# Altium PCB EE209_PCB.PcbDoc
Units mm, origin at the board's own origin, x right, y up, seen from the top; angles counter-clockwise.
Board outline 152.4 x 101.6 mm, 2 copper layers (Top Layer, Bottom Layer); 47 components, 37 nets, 176 pads, 0 vias.
Unrouted connection lines stored in the file: 116.
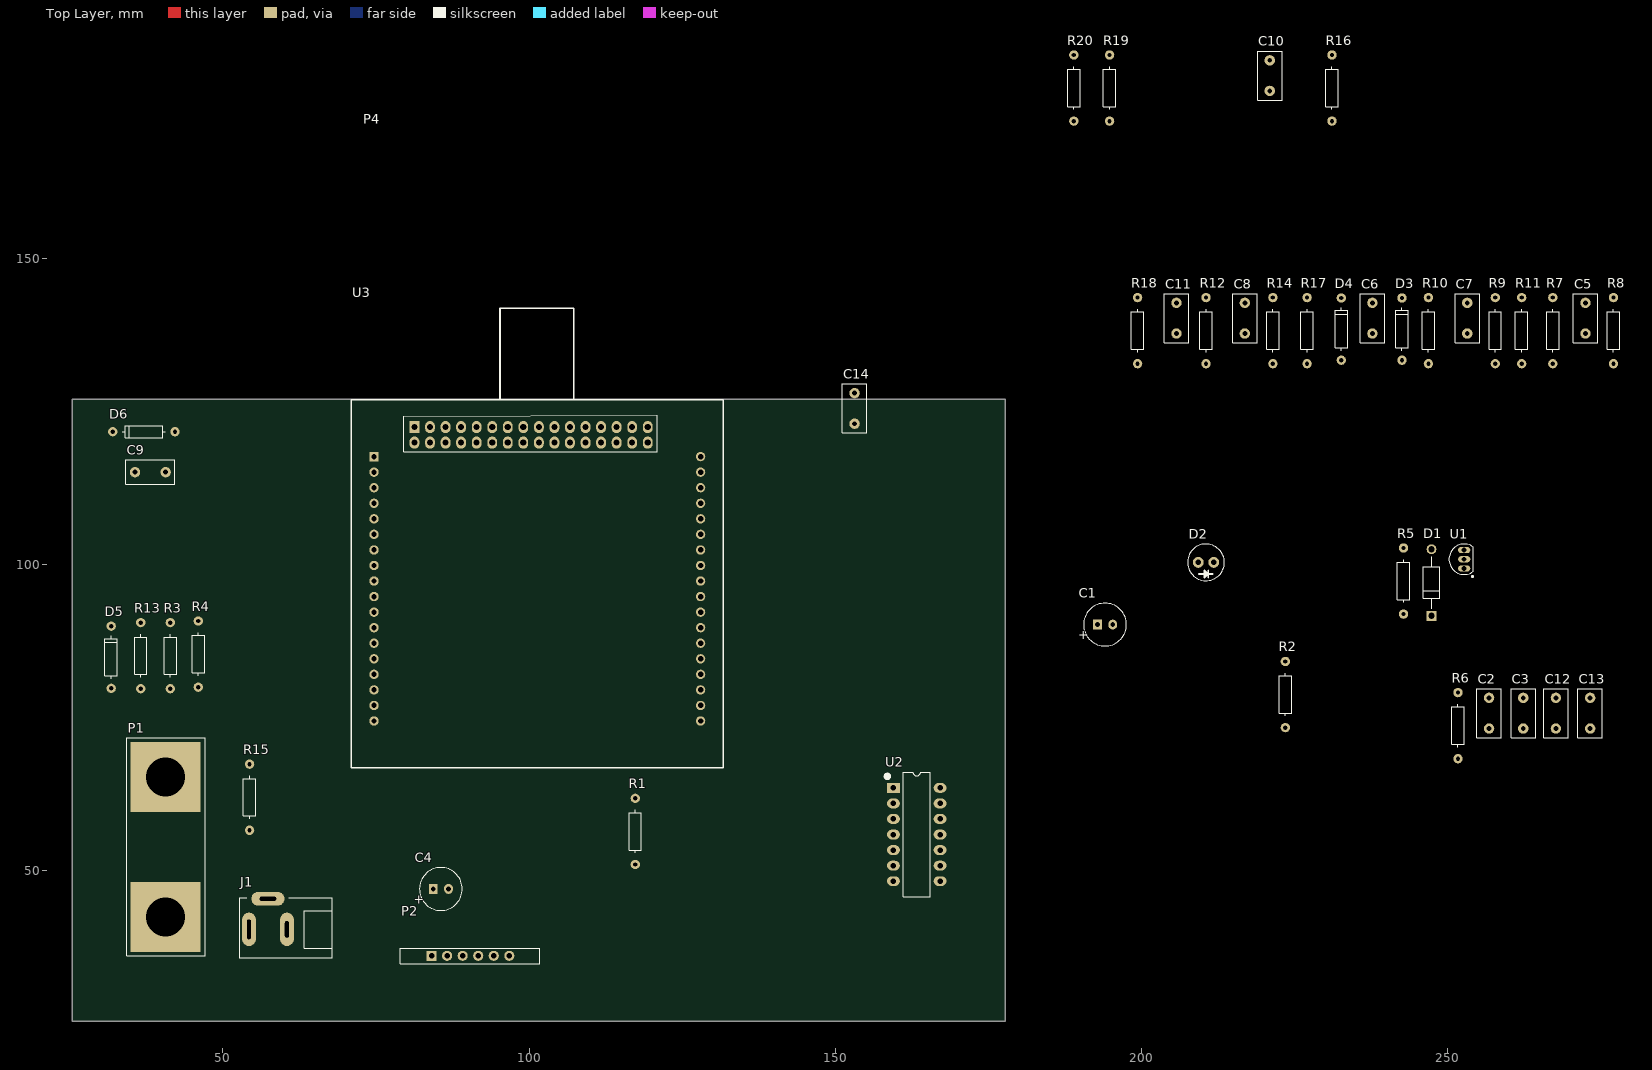
[diagram p0: Top Layer view]
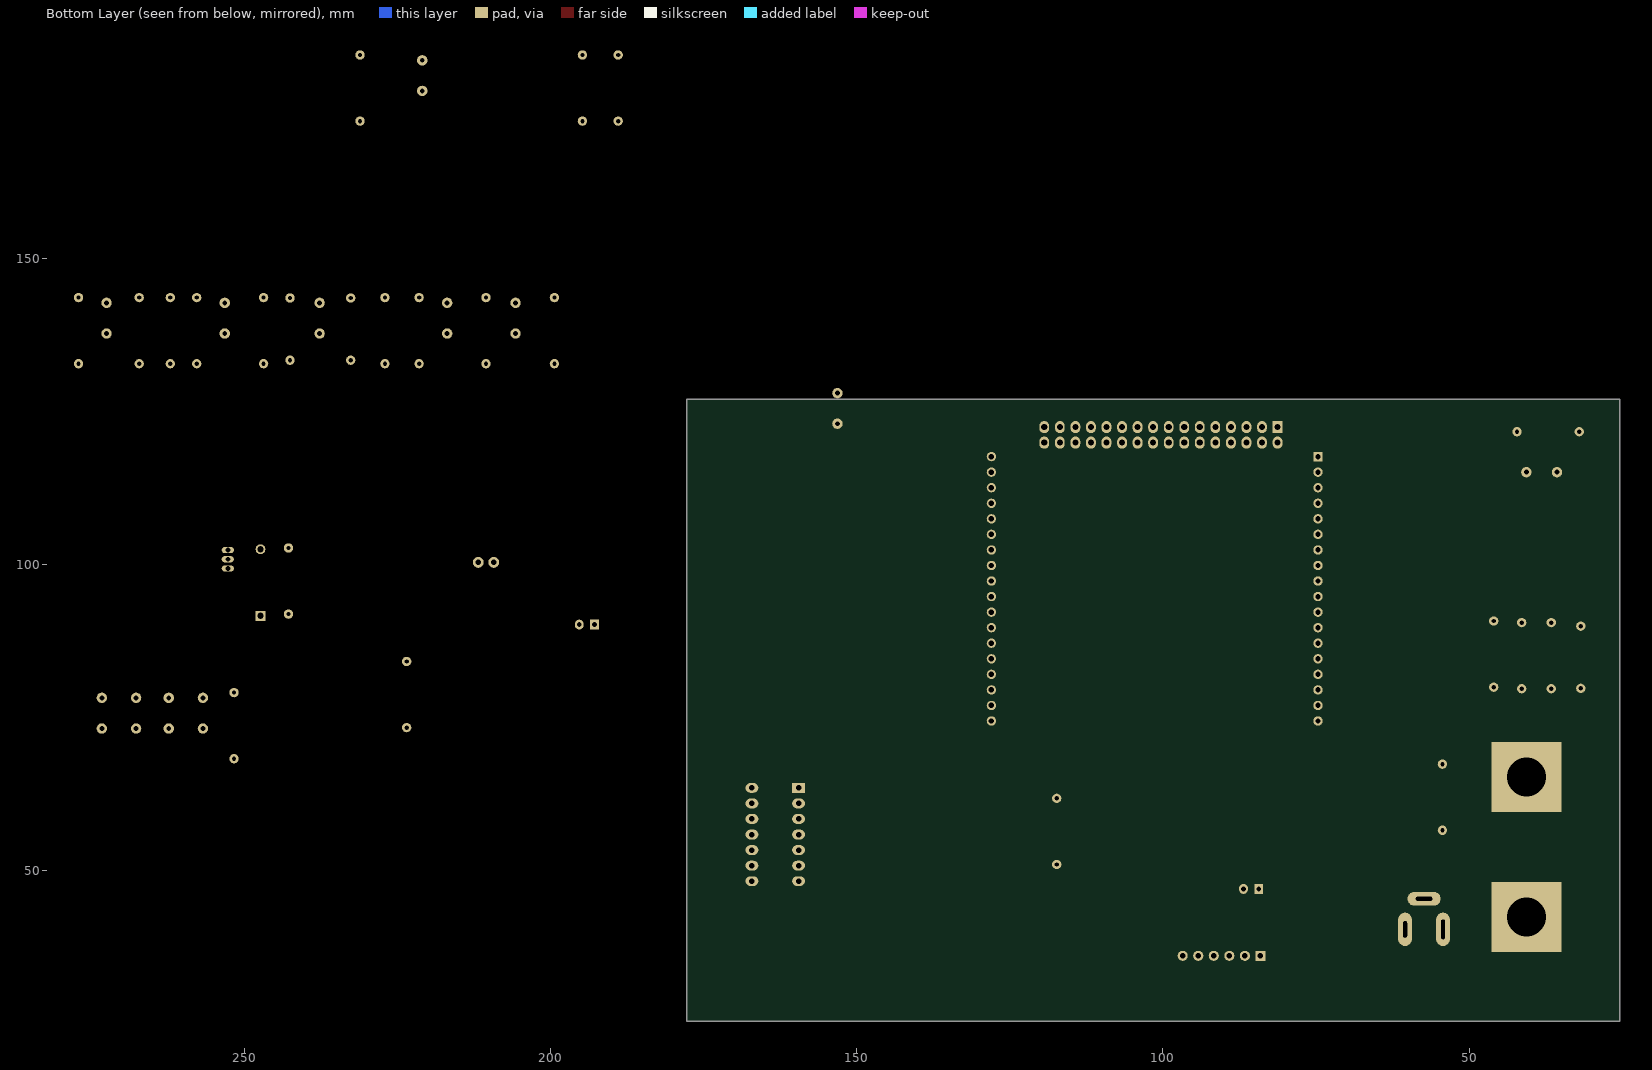
[diagram p1: Bottom Layer view, seen from below]

## Layer stack, top to bottom
Top Solder: solder mask 0.0102, Solder Resist, Dk 3.5
Top Layer: signal copper 0.0356
Dielectric 1: dielectric 0.32, FR-4, Dk 4.8
Bottom Layer: signal copper 0.0356
Bottom Solder: solder mask 0.0102, Solder Resist, Dk 3.5

## Board outline
25.4,25.4 177.8,25.4 177.8,127 25.4,127

## Design rules (kind name [scope] priority, off if disabled: settings)
BoardOutlineClearance [All] p1: gap=0.5 ignorepadtopadclearanceinfootprint=FALSE
Clearance [All] p1: gap=0.4 ignorepadtopadclearanceinfootprint=FALSE
Height [All] p1: minheight=0 maxheight=50 prefheight=12.7
HoleSize [All] p1: absolutevalues=TRUE maxlimit=6 minlimit=0.5 maxpercent=80.000 minpercent=20.000
MinimumAnnularRing [All] p1: minimumring=0.076
MinimumSolderMaskSliver [All] p1: minsoldermaskwidth=0.1
PlaneConnect [All] p1: planeconnectstyle=Relief reliefexpansion=0.6 reliefentries=4 reliefconductorwidth=0.6 reliefairgap=0.4
PolygonConnect PolygonConnect_1 [All] p1: connectstyle=Relief reliefconductorwidth=0.6 reliefentries=4 polygonreliefangle="90 Angle" airgapwidth=0.4
RoomDefinition EE209_Schematic [InComponentClass('EE209_Schematic')] p1: confinementstyle=ConfineIn formatcopy=TRUE lockcomponents=FALSE outline 178.816,67.564 485.14,67.564 485.14,186.944 178.816,186.944
RoutingCorners [All] p1: cornerstyle=Round minsetback=2.54 maxsetback=2.54
RoutingVias [All] p1: holewidth=0.6 width=1 viastyle="Through Hole" minholewidth=0.5 minwidth=0.8 maxholewidth=1 maxwidth=2
SilkToSilkClearance [All] p1: silktosilkclearance=0.1
SilkToSolderMaskClearance [IsPad] p1: minsilkscreentomaskgap=0.1 clearancetoexposedcopper=TRUE
SolderMaskExpansion [All] p1: expansion=0.102 istentingtop=FALSE
Width [All] p1: maxlimit=10 minlimit=0.4 preferedwidth=0.6
23 further rules are at their usual default settings.

## Components (designator, comment, footprint, x,y, rotation, side; value= is the part's Value field where it differs from the comment)
C1 "*" "CAP-RAD-2.5mm Pitch" 194.076,90.17 r0 top
C2 "*" CCAP-5P0 256.794,75.692 r90 top
C3 "*" CCAP-5P0 262.382,75.692 r90 top
C4 "*" "CAP-RAD-2.5mm Pitch" 85.598,46.99 r0 top
C5 "*" CCAP-5P0 272.542,140.208 r90 top
C6 "*" CCAP-5P0 237.744,140.208 r90 top
C7 "*" CCAP-5P0 253.238,140.208 r90 top
C8 "*" CCAP-5P0 216.916,140.208 r90 top
C9 "*" CCAP-5P0 38.14,115.062 r0 top
C10 "*" CCAP-5P0 220.98,179.832 r90 top
C11 "*" CCAP-5P0 205.74,140.208 r90 top
C12 "*" CCAP-5P0 267.716,75.692 r90 top
C13 "*" CCAP-5P0 273.304,75.692 r90 top
C14 "*" CCAP-5P0 153.162,125.476 r90 top
D1 "1N4007" 1N4007-MFG 247.396,97.028 r90 top
D2 "Green" LED 210.566,100.33 r0 top
D3 "BZX79-CXVX" AXIAL-Zener-0.4 242.57,138.43 r90 top
D4 "BZX79-CXVX" AXIAL-Zener-0.4 232.664,138.43 r90 top
D5 "BZX79-CXVX" AXIAL-Zener-0.4 31.75,84.836 r90 top
D6 "BZX79-CXVX" AXIAL-Zener-0.4 37.084,121.666 r180 top
J1 "DC barrel jack" AC-Socket 60.252,40.386 r180 top value=socket
P1 "Dual Banana Plugs" "Dual Banana Plug" 40.64,53.848 r90 top
P2 "BLE Module Header" HM10_HDR1X6 84.074,36.068 r0 top
P4 "Display" Display 99.06,121.158 r180 top
R1 "*" AXIAL-0.4 117.348,56.388 r90 top
R2 "*" AXIAL-0.4 223.52,78.74 r90 top
R3 "*" AXIAL-0.4 41.402,85.09 r270 top
R4 "*" AXIAL-0.4 45.974,85.344 r270 top
R5 "*" AXIAL-0.4 242.824,97.282 r90 top
R6 "*" AXIAL-0.4 251.714,73.66 r90 top
R7 "*" AXIAL-0.4 267.208,138.176 r90 top
R8 "*" AXIAL-0.4 277.114,138.176 r90 top
R9 "*" AXIAL-0.4 257.81,138.176 r90 top
R10 "*" AXIAL-0.4 246.888,138.176 r90 top
R11 "*" AXIAL-0.4 262.128,138.176 r90 top
R12 "*" AXIAL-0.4 210.566,138.176 r90 top
R13 "*" AXIAL-0.4 36.576,85.09 r90 top
R14 "*" AXIAL-0.4 221.488,138.176 r90 top
R15 "*" AXIAL-0.4 54.356,61.976 r90 top
R16 "*" AXIAL-0.4 231.14,177.8 r90 top
R17 "*" AXIAL-0.4 227.076,138.176 r90 top
R18 "*" AXIAL-0.4 199.39,138.176 r90 top
R19 "*" AXIAL-0.4 194.818,177.8 r90 top
R20 "*" AXIAL-0.4 188.976,177.8 r90 top
U1 "L78L05ACZ" TO-92 252.73,100.838 r0 top
U2 "LM324" DIP-14 163.322,55.88 r0 top
U3 "ATmega328PB Xplained Mini Header" "ATmeg328P Xplained" 101.346,96.012 r0 top

## Footprints (in the part's own frame and the unit in brackets; to place one, negate y for a bottom-side part, rotate by r counter-clockwise, add the part's x,y. Pads: shape width x height; smd on the part's side, far side on the other; paste and mask are expansions set on the pad)
1N4007-MFG [mm]
  round 1.6 hole 1.05 paste-1000 mask+0: 1(5.438,0)
  rect 1.6x1.6 hole 1.05 paste-1000 mask+0: 2(-5.438,0)
  silkscreen extent -4.24,-1.35 4.24,1.35, body extent -6.34,-1.45 6.34,1.45, height 0.25
AC-Socket [mm]
  oval 2.25x5.45 hole 0.635 slot 3.175 at 90 deg: 1(6,0)
  oval 5.45x2.25 hole 0.635 slot 2.667 at 0 deg: 2(2.9,-5)
  oval 2.25x5.45 hole 0.635 slot 2.667 at 90 deg: 3(-0.2,0)
  silkscreen extent -7.6,-5.2 7.6,4.6, body extent -6.7,-5 6,4.2, height 10.5
"ATmeg328P Xplained" [mil]
  rect 60x60 hole 35: 1(-1050,850)
  round 60 hole 35: 2(-1050,750) 3(-1050,650) 4(-1050,550) 5(-1050,450) 6(-1050,350) 7(-1050,250) 8(-1050,150) 9(-1050,50) 10(-1050,-50) 11(-1050,-150) 12(-1050,-250) 13(-1050,-350) 14(-1050,-450) 15(-1050,-550) 16(-1050,-650) 17(-1050,-750) 18(-1050,-850) 19(1050,-850) 20(1050,-750) 21(1050,-650) 22(1050,-550) 23(1050,-450) 24(1050,-350) 25(1050,-250) 26(1050,-150) 27(1050,-50) 28(1050,50) 29(1050,150) 30(1050,250) 31(1050,350) 32(1050,450) 33(1050,550) 34(1050,650) 35(1050,750) 36(1050,850)
  silkscreen extent -1195,-1150 1195,1805, body extent -1201,-1150 1161,1845, height 452
AXIAL-0.4 [mm]
  round 1.524 hole 0.7: 1(-5.4,0) 2(5.4,0)
  silkscreen extent -3.5,-1.02 3.5,1.02, body extent -5.7,-1.3 5.7,1.3, height 2.7
AXIAL-Zener-0.4 [mil]
  round 60 hole 27.56: 1(-200,0) 2(200,0)
  silkscreen extent -138,-40 138,40, body extent -211,-52 211,52, height 92
"CAP-RAD-2.5mm Pitch" [mm] "Cap 6.3 X 11.2"
  rect 1.45x1.6 hole 0.8: 1(-1.25,0)
  oval 1.45x1.6 hole 0.8: 2(1.25,0)
  silkscreen extent -3.5,-3.5 3.5,3.5, body extent -3.15,-3.15 3.15,3.15, height 11.5
CCAP-5P0 [mm]
  round 1.7 hole 0.8: 1(-2.5,0) 2(2.5,0)
  silkscreen extent -4,-2 4,2, body extent -3.25,-1.5 3.25,1.5, height 6.5
DIP-14 [mm] "DIP; 14 Leads; Row Spacing 7.62 mm; Pitch 2.54 mm"
  rect 2.1x1.6 hole 0.9: 1(-3.81,7.62)
  oval 2.1x1.6 hole 0.9: 2(-3.81,5.08) 3(-3.81,2.54) 4(-3.81,0) 5(-3.81,-2.54) 6(-3.81,-5.08) 7(-3.81,-7.62) 8(3.81,-7.62) 9(3.81,-5.08) 10(3.81,-2.54) 11(3.81,0) 12(3.81,2.54) 13(3.81,5.08) 14(3.81,7.62)
  silkscreen extent -5.1,-10.2 2.2,10.2, body extent -5.07,-10.2 5.09,10.12, height 9.47
Display [mm]
  rect 1.6x2 hole 1: 1(17.78,-1.27)
  oval 1.6x2 hole 1: 2(17.78,1.27) 3(15.24,-1.27) 4(15.24,1.27) 5(12.7,-1.27) 6(12.7,1.27) 7(10.16,-1.27) 8(10.16,1.27) 9(7.62,-1.27) 10(7.62,1.27) 11(5.08,-1.27) 12(5.08,1.27) 13(2.54,-1.27) 14(2.54,1.27) 15(0,-1.27) 16(0,1.27) 17(-2.54,-1.27) 18(-2.54,1.27) 19(-5.08,-1.27) 20(-5.08,1.27) 21(-7.62,-1.27) 22(-7.62,1.27) 23(-10.16,-1.27) 24(-10.16,1.27) 25(-12.7,-1.27) 26(-12.7,1.27) 27(-15.24,-1.27) 28(-15.24,1.27) 29(-17.78,-1.27) 30(-17.78,1.27) 31(-20.32,-1.27) 32(-20.32,1.27)
  silkscreen extent -21.84,-3.18 19.56,2.79, body extent -32.6,-50 26.4,4, height 13
"Dual Banana Plug" [mm] "Connector; 2 Position"
  rect 11.43x11.43 hole 6.35: 1(-11.43,0) 2(11.43,0)
  silkscreen extent -17.8,-6.48 17.8,6.35, body extent -17.38,-5.99 17.43,5.99, height 5.5
HM10_HDR1X6 [mil] "Connector; Header; 6 Position"
  rect 65x65 hole 35.43: 1(0,0)
  round 65 hole 35.43: 2(100,0) 3(200,0) 4(300,0) 5(400,0) 6(500,0)
  silkscreen extent -200,-50 695,50, body extent -142,-39 571,228, height 1843
LED [mil]
  round 70 hole 35.43: 1(-50,0) 2(50,0)
  silkscreen extent -118,-118 118,118, body extent -98,-98 98,98, height 413
TO-92 [mm] "TO, Flat Index; 3 In-Line, Axial Leads; Body Dia. 4.5mm; Leads 0.51 x 0.48 mm (max)"
  oval 2x1 hole 0.8: 1(0,-1.5) 2(0,0) 3(0,1.5)
  silkscreen extent -2.48,-2.95 1.5,2.48, body extent -2.4,-2.4 1.53,2.4, height 6.73

## Part data
C1 C4: library part ElecCap_TH_2P0, "Electrolytic capacitor with radial package, 2mm pitch and 5.2mm diameter", LatestRevisionDate=17-Jul-2002, LatestRevisionNote="Re-released for DXP Platform.", PackageDescription="Polarized Capacitor; 2 Leads", PackageReference=POLAR0.8, Published=8-Jun-2000, Publisher="Altium Limited"
C2 C3 C5 C6 C7 C8 C9 C10 C11 C12 C13 C14: library part CerCap_TH_5P0, "TH ceramic capacitor with 5mm pitch"
D1: library part 1N4007_TH_4AX0, "1N4007 1000V standard axial diode", Supplier Part Number 1=1N4007RLGOSCT-ND, ComponentLink1Description=https://www.fairchildsemi.com/datasheets/1N/1N914.pdf, ComponentLink1URL=https://www.fairchildsemi.com/datasheets/1N/1N914.pdf, Supplier 1=Digi-Key
D2: library part LED_TH_2P54, "Typical throughole GaAs LED with 2.54mm pitch", Manufacturer="Generic Components", Class I=Optoelectronic, Class II=LED, Published=8-Jun-2000, Publisher="Altium Limited", Revision="July-2002: Re-released for DXP Platform."
D3 D4 D5 D6: library part Zener_TH_4AX0, "Axial zener diode BZX79 series", Manufacturer="Nexperia USA Inc.", Manufacturer Part Number=BZX79-C4V7,143, Operating Temperature="-65°C ~ 200°C", Package / Case="DO-204AH, DO-35, Axial", Supplier Device Package=DO-35, Supplier Part Number 1=1727-1864-1-ND, Tolerance=±5%, Category="Discrete Semiconductor Products", ComponentLink1Description=https://assets.nexperia.com/documents/data-sheet/BZX79.pdf, ComponentLink1URL=https://assets.nexperia.com/documents/data-sheet/BZX79.pdf, Mounting Type="Through Hole", Packaging="Cut Tape (CT)", Part Status=Active, Pricing 1="1=0.23, 10=0.206, 100=0.1123, 500=0.06912, 1000=0.04714 (NZD)", RoHS="RoHS Compliant", Stock 1=8933, Supplier 1=Digi-Key
J1: library part AC_Input, "DC barrel jack connection to AC source"
P1: library part AC_Output, "Dual banana plugs connection to the AC load", LatestRevisionDate=17-Jul-2002, LatestRevisionNote="Re-released for DXP Platform.", Publisher="Altium Limited"
P2: library part BLEModule_TH, "2.54mm pitch 6-pin header for BLE module", LatestRevisionDate=17-Jul-2002, LatestRevisionNote="Re-released for DXP Platform.", Publisher="Altium Limited"
P4: "16-Pin Header Connecting Display"
R1 R2 R3 R4 R5 R6 R7 R8 R9 R10 R11 R12 R13 R14 R15 R16 R17 R18 R19 R20: library part Res_TH_0AX4, "Through hole resistor", ComponentLink1Description=http://www.royalohm.com/pdf/product2017/PrecisionMetalMF.pdf, LatestRevisionDate=17-Jul-2002, LatestRevisionNote="Re-released for DXP Platform.", PackageReference=AXIAL-0.4, Published=8-Jun-2000, Publisher="Altium Limited"
U1: library part L78L05_TH_TO92, "Voltage Regulator 5V", Base Part Number=LM78L05, Current - Output=100mA, Manufacturer="ON Semiconductor", Manufacturer Part Number=LM78L05ACZX, Operating Temperature="-40°C ~ 125°C", Package / Case="TO-226-3, TO-92-3 (TO-226AA) (Formed Leads)", Supplier Device Package=TO-92-3, Supplier Part Number 1=LM78L05ACZXCT-ND, Voltage - Input (Max)=30V, Voltage - Output (Max)=-, Voltage - Output (Min/Fixed)=5V, Category="Integrated Circuits (ICs)", ComponentLink1Description=https://www.fairchildsemi.com/datasheets/MC/MC78L05A.pdf, ComponentLink1URL=https://www.fairchildsemi.com/datasheets/MC/MC78L05A.pdf, Control Features=-, Mounting Type="Through Hole", Output Configuration=Positive, Output Type=Fixed, Packaging="Cut Tape (CT)", Part Status=Active, Pricing 1="1=0.69, 10=0.517, 100=0.3226, 500=0.2207, 1000=0.16976 (NZD)", Protection Features="Over Temperature, Short Circuit", PSRR="80dB (120Hz)", RoHS="RoHS Compliant", Stock 1=7782, Supplier 1=Digi-Key, Voltage Dropout (Max)=-
U2: library part LM324N_TH_DIP16, "IC OPAMP GP 14DIP", Current - Supply=1mA, Manufacturer="ON Semiconductor", Manufacturer Part Number=LM324N, Operating Temperature="0°C ~ 70°C", Package / Case="14-DIP (0.300\", 7.62mm)", Supplier Device Package=14-DIP, Supplier Part Number 1=LM324NFS-ND, Voltage - Supply, Single/Dual (±)="3 V ~ 32 V, ±1.5 V ~ 16 V", Amplifier Type="General Purpose", Base Part Number=LM324, Category="Integrated Circuits (ICs)", ComponentLink1Description=https://www.fairchildsemi.com/datasheets/LM/LM2902.pdf, ComponentLink1URL=https://www.fairchildsemi.com/datasheets/LM/LM2902.pdf, Mounting Type="Through Hole", Output Type=-, Packaging=Tube, Part Status=Active, Pricing 1="1=0.9, 10=0.775, 100=0.5789, 500=0.45482, 1000=0.35145 (NZD)", RoHS="RoHS Compliant", Slew Rate=-, Stock 1=2900, Supplier 1=Digi-Key
U3: library part ATmega328PBXplained_TH, "Dual 18-pin headers connecting to ATmega328PB Xplained Mini", Manufacturer="Microchip Technology", Manufacturer Part Number=ATMEGA328PB-XMINI, Operating System=-, Supplier Part Number 1=ATMEGA328PB-XMINI-ND, Board Type="Evaluation Platform", Category="Development Boards, Kits, Programmers", ComponentLink1Description=http://www.microchip.com/mymicrochip/filehandler.aspx?ddocname=en589665, ComponentLink1URL=http://www.microchip.com/mymicrochip/filehandler.aspx?ddocname=en589665, Contents=Board(s), Core Processor=AVR, For Use With/Related Products=ATmega328P, Mounting Type=Fixed, Part Status=Active, Platform="ATmega328P Xplained Mini", Pricing 1="1=15.11 (NZD)", RoHS="RoHS Compliant", Stock 1=454, Supplier 1=Digi-Key, Type="MCU 8-Bit"

## Nets (pads, with @x,y where several pads share a name; then routed paths per layer and width w, separated by ;. In a path a pad name is that pad's centre, name@x,y a point inside that pad or via, vN(x,y) a via of type N, cw(c..) or ccw(c..) an arc to the next point about the centre after c; other vN are vias at no path point)
5V: C3.1 C4.1 C12.1 C13.1 C14.1 D2.1 P2.1 P4.1 P4.2 P4.31 P4.32 R17.2 U1.1 U2.4
DS1: P4.5 P4.6 U3.23
DS2: P4.7 P4.8 U3.24
DS3: P4.9 P4.10 U3.25
DS4: P4.11 P4.12 U3.26
GND: C1.2 C2.2 C3.2 C4.2 C6.2 C7.2 C9.2 C10.2 C11.1 C12.2 C13.2 C14.2 D4.1 D6.1 J1.2 J1.3 P2.2 P4.3 P4.4 R2.1 R3.1 R4.1 R6.1 R7.1 R12.1 R18.1 R20.1 U2.11 U3.9 U3.10 U3.33
Imeas: C10.1 R16.2 U3.14
Isensp: D5.1 P1.2 R3.2 R4.2 R13.1
LED1: P4.13 P4.14
LED2: P4.15 P4.16
LED3: P4.17 P4.18
LED4: P4.19 P4.20
NetC5_1: C5.1 R8.2 R11.1 U2.7
NetC5_2: C5.2 R7.2 R8.1 U2.6
NetC6_1: C6.1 R9.2 R10.2 U2.5
NetC8_1: C8.1 R14.2 R16.1 U2.1
NetC8_2: C8.2 R12.2 R14.1 U2.2
NetC9_1: C9.1 R13.2 R15.2 U2.3
NetC11_2: C11.2 R17.1 R18.2 U2.12
NetD1_2: D1.2 R5.1
NetD2_2: D2.2 R6.2
NetD3_2: D3.2 D4.2
NetD5_2: D5.2 D6.2
NetP2_4: P2.4 R19.1 R20.2
OE: P4.27 P4.28
Offset: R10.1 R15.1 U2.9 U2.13 U2.14 U3.15
RX: P2.3 U3.19
SH_CP: P4.23 P4.24 U3.16
SH_DS: P4.29 P4.30 U3.17
SH_ST: P4.25 P4.26 U3.18
SRCLR: P4.21 P4.22
TX: R19.2 U3.20
Vin: D1.1 J1.1 P1.1 R1.2
Vmeas: C7.1 R11.2 U2.10 U3.13
Vrect: C1.1 C2.1 R5.2 U1.3
Vsensp: D3.1 R1.1 R2.2 R9.1
Vzc: U2.8 U3.21
pads on no net: P2.5 P2.6 U1.2 U3.1 U3.2 U3.3 U3.4 U3.5 U3.6 U3.7 U3.8 U3.11 U3.12 U3.22 U3.27 U3.28 U3.29 U3.30 U3.31 U3.32 U3.34 U3.35 U3.36

## Text inside footprints (layer, text, board x,y; h text height)
C1: Top Overlay "+" at 189.676,87.77 h1.5
C4: Top Overlay "+" at 81.198,44.59 h1.5